# EAGLE board motor_driver (EAGLE 5.11)
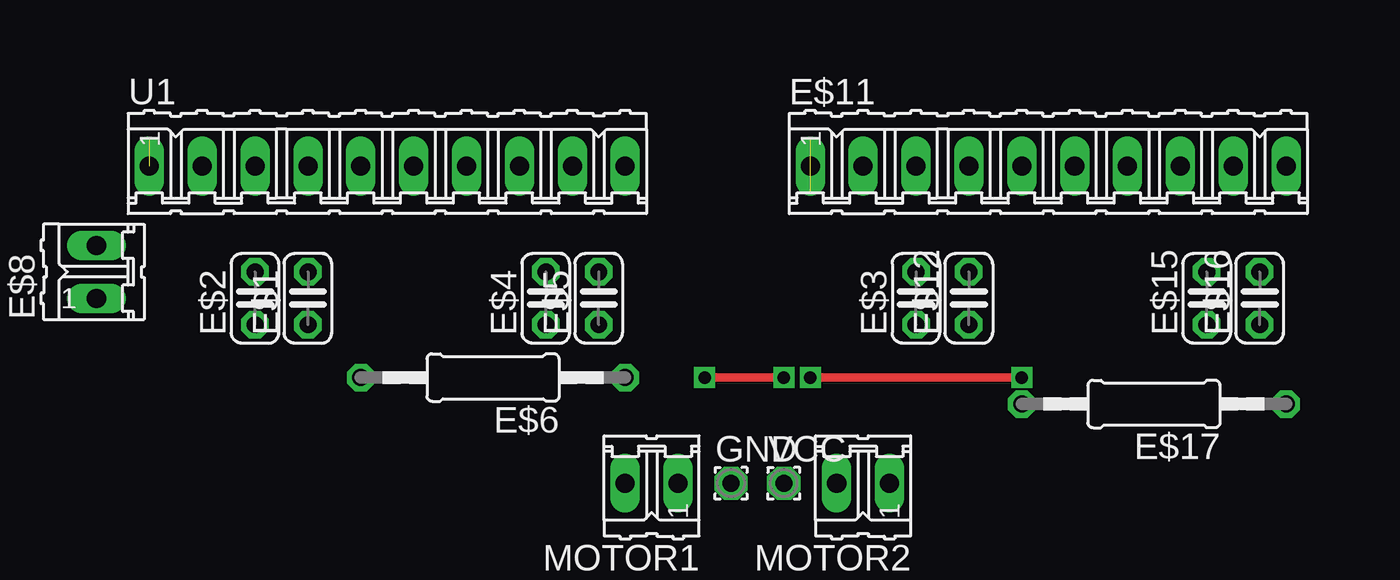
[diagram p0: board, top side]
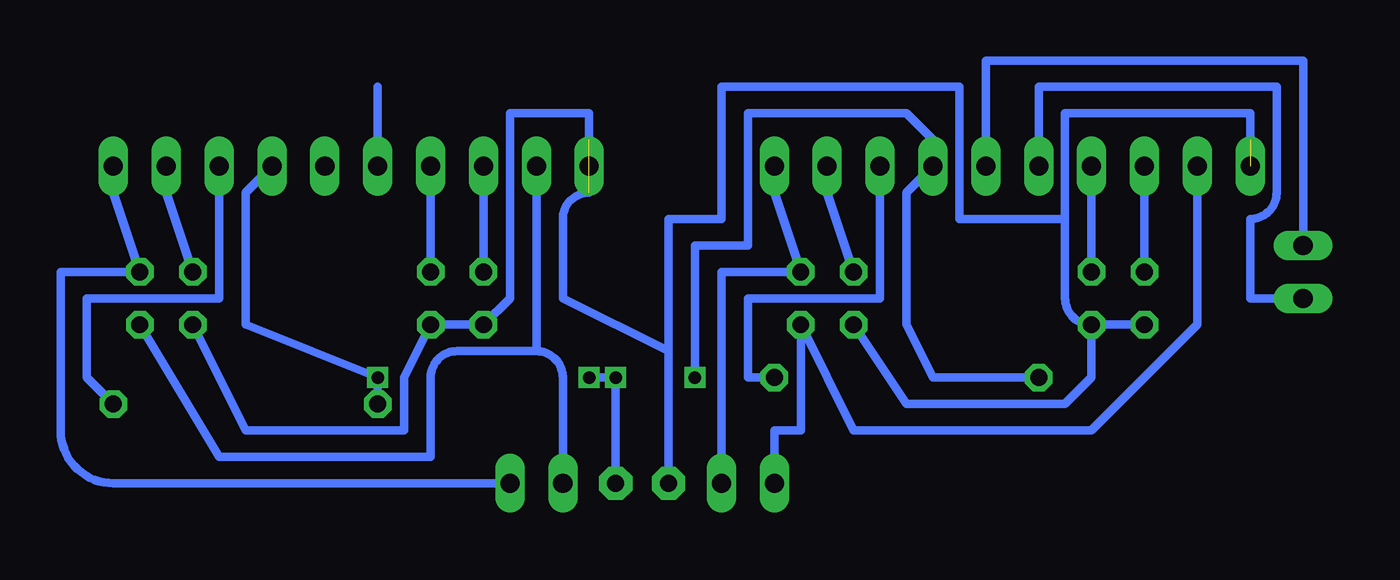
[diagram p1: board, bottom side, seen from below]

No outline drawn. Coordinates in mm, seen from the top.
Copper layers (1*16): Top 0.035mm / dielectric 1.5mm / Bottom 0.035mm
Design rules "default": minimum track width 10mil, minimum drill 32mil, track to track 12mil, track to pad 12mil, pad to pad 12mil, via to via 12mil, smd to smd 8mil, copper to edge 40mil, drill to drill 40mil, minimum pad ring 10mil, minimum via ring 8mil, stop-mask expansion 4mil, vias tented up to drill 0mil, thermal gap 10mil

## Footprints (pad centres in the part's own frame; a part is rotated, then mirrored left to right if it is on the bottom)
C025-024X044 = drill 0.813 octagon: 1 -1.27,0; 2 1.27,0
0207/12 = drill 0.813 octagon: 1 -6.35,0; 2 6.35,0
02P = drill 0.914 long: 1 -1.27,0; 2 1.27,0
10P = drill 0.914 long: 1 -11.43,0; 2 -8.89,0; 3 -6.35,0; 4 -3.81,0; 5 -1.27,0; 6 1.27,0; 7 3.81,0; 8 6.35,0; 9 8.89,0; 10 11.43,0
1,6/0,8 = drill 0.813 pad 1.6 octagon: 1 0,0

## Placement (x,y rotation side)
E$1  [C025-024X044]  24.13,62.23 90 top
E$2  [C025-024X044]  21.59,62.23 90 top
E$3  [C025-024X044]  53.34,62.23 90 top
E$4  [C025-024X044]  35.56,62.23 90 top
E$5  [C025-024X044]  38.1,62.23 90 top
E$6  [0207/12]  33.02,58.42 180 top
E$8  [02P]  13.97,63.5 90 top
E$11  [10P]  59.69,68.58 0 top
E$12  [C025-024X044]  55.88,62.23 90 top
E$15  [C025-024X044]  67.31,62.23 90 top
E$16  [C025-024X044]  69.85,62.23 90 top
E$17  [0207/12]  64.77,57.15 180 top
GND  [1,6/0,8]  44.45,53.34 0 top
MOTOR1  [02P]  40.64,53.34 180 top
MOTOR2  [02P]  50.8,53.34 180 top
U1  BA6222  [10P]  27.94,68.58 0 top
VCC  [1,6/0,8]  46.99,53.34 0 top

## Library data of the parts
E$1-E$6 E$12 E$15-E$17 = ref-packages
E$8 E$11 MOTOR1 MOTOR2 U1 = con-amp-quick
GND VCC = wirepad

## Nets
GND: E$1.1 E$2.1 E$3.1 E$4.1 E$12.1 E$15.1 GND.1 U1.1
MOTOR1_1: E$5.1
MOTOR1_2: E$5.2
S$1: E$2.2
S$2: E$1.2
S$3: E$4.2
S$5: E$6.2 U1.7
S$6: E$6.1
S$7: E$3.2
S$9: E$12.2
S$12: E$15.2
S$13: E$16.2 MOTOR2.1
S$14: E$11.2 E$16.1 MOTOR2.2
S$15: E$17.1
VCC: E$11.7 E$17.2 VCC.1

## Tracks (layer width: path | path; a pad name or v marks a point on that pad's centre or on a via)
GND  (2 unrouted)
  Bottom 0.406: E$15.1 64.77,55.88 57.15,55.88 57.15,58.42 E$12.1 E$3.1 52.07,62.23 52.07,71.12 48.26,71.12 48.26,69.85 | 48.26,67.31 arc-90 49.53,66.04 49.53,62.23 44.45,59.69 | 44.45,59.69 GND.1 | 44.45,59.69 44.45,66.04 41.91,66.04 41.91,72.39 30.48,72.39 30.48,66.04 25.4,66.04 | 16.51,69.85 16.51,71.12 25.4,71.12 25.4,66.04 | E$4.1 33.02,57.15 25.4,57.15 24.13,58.42 E$1.1 | 25.4,66.04 25.4,62.23 arc-90 E$1.1 | E$2.1 E$1.1
MOTOR1_1
  Bottom 0.406: 19.05,67.31 19.05,60.96 24.13,55.88 35.56,55.88 E$5.1 38.1,55.88 39.37,55.88 39.37,53.34
MOTOR1_2
  Bottom 0.406: 39.37,67.31 E$5.2 41.91,63.5 41.91,53.34
RRR
  Bottom 0.406: 26.67,69.85 26.67,72.39 15.24,72.39 15.24,67.31 arc90 16.51,66.04 16.51,62.23 13.97,62.23
RRR1
  Bottom 0.406: 58.42,68.58 58.42,72.39
S$1
  Bottom 0.406: E$2.2 21.59,67.31
S$2
  Bottom 0.406: E$1.2 24.13,67.31
S$3
  Bottom 0.406: E$4.2 36.83,67.31
S$5
  Bottom 0.406: E$6.2 31.75,58.42 33.02,60.96 33.02,67.31 U1.7
S$6
  Bottom 0.406: 34.29,67.31 34.29,62.23 40.64,62.23 40.64,58.42 E$6.1
S$7
  Bottom 0.406: E$3.2 53.34,67.31
S$9
  Bottom 0.406: E$12.2 55.88,68.58
S$10
  Bottom 0.406: 29.21,69.85 29.21,73.66 13.97,73.66 13.97,64.77
S$12
  Bottom 0.406: E$15.2 68.58,67.31
S$13
  Bottom 0.406: 71.12,67.31 E$16.2 73.66,63.5 73.66,55.88 arc-90 71.12,53.34 MOTOR2.1
S$14
  Bottom 0.406: E$16.1 66.04,54.61 55.88,54.61 55.88,58.42 arc90 54.61,59.69 50.8,59.69 | 50.8,59.69 E$11.2 | 50.8,59.69 arc90 49.53,58.42 MOTOR2.2
S$15
  Bottom 0.406: 66.04,68.58 66.04,62.23 72.39,62.23 72.39,58.42 E$17.1
VCC  (via drill 0.6)
  Top 0.406: v48.26,58.42 v58.42,58.42 | v43.18,58.42 v46.99,58.42
  Bottom 0.406: E$11.7 64.77,67.31 64.77,60.96 v58.42,58.42 E$17.2 | v46.99,58.42 v48.26,58.42 | v43.18,58.42 43.18,64.77 40.64,64.77 40.64,71.12 33.02,71.12 31.75,69.85 | 46.99,57.15 v46.99,58.42 | v46.99,58.42 VCC.1